# Altium PCB Sensor.PcbDoc
Units mm, origin at the board's own origin, x right, y up, seen from the top; angles counter-clockwise.
Board outline 29.97 x 31.24 mm, 2 copper layers (Top Layer, Bottom Layer); 27 components, 23 nets, 95 pads, 23 vias.
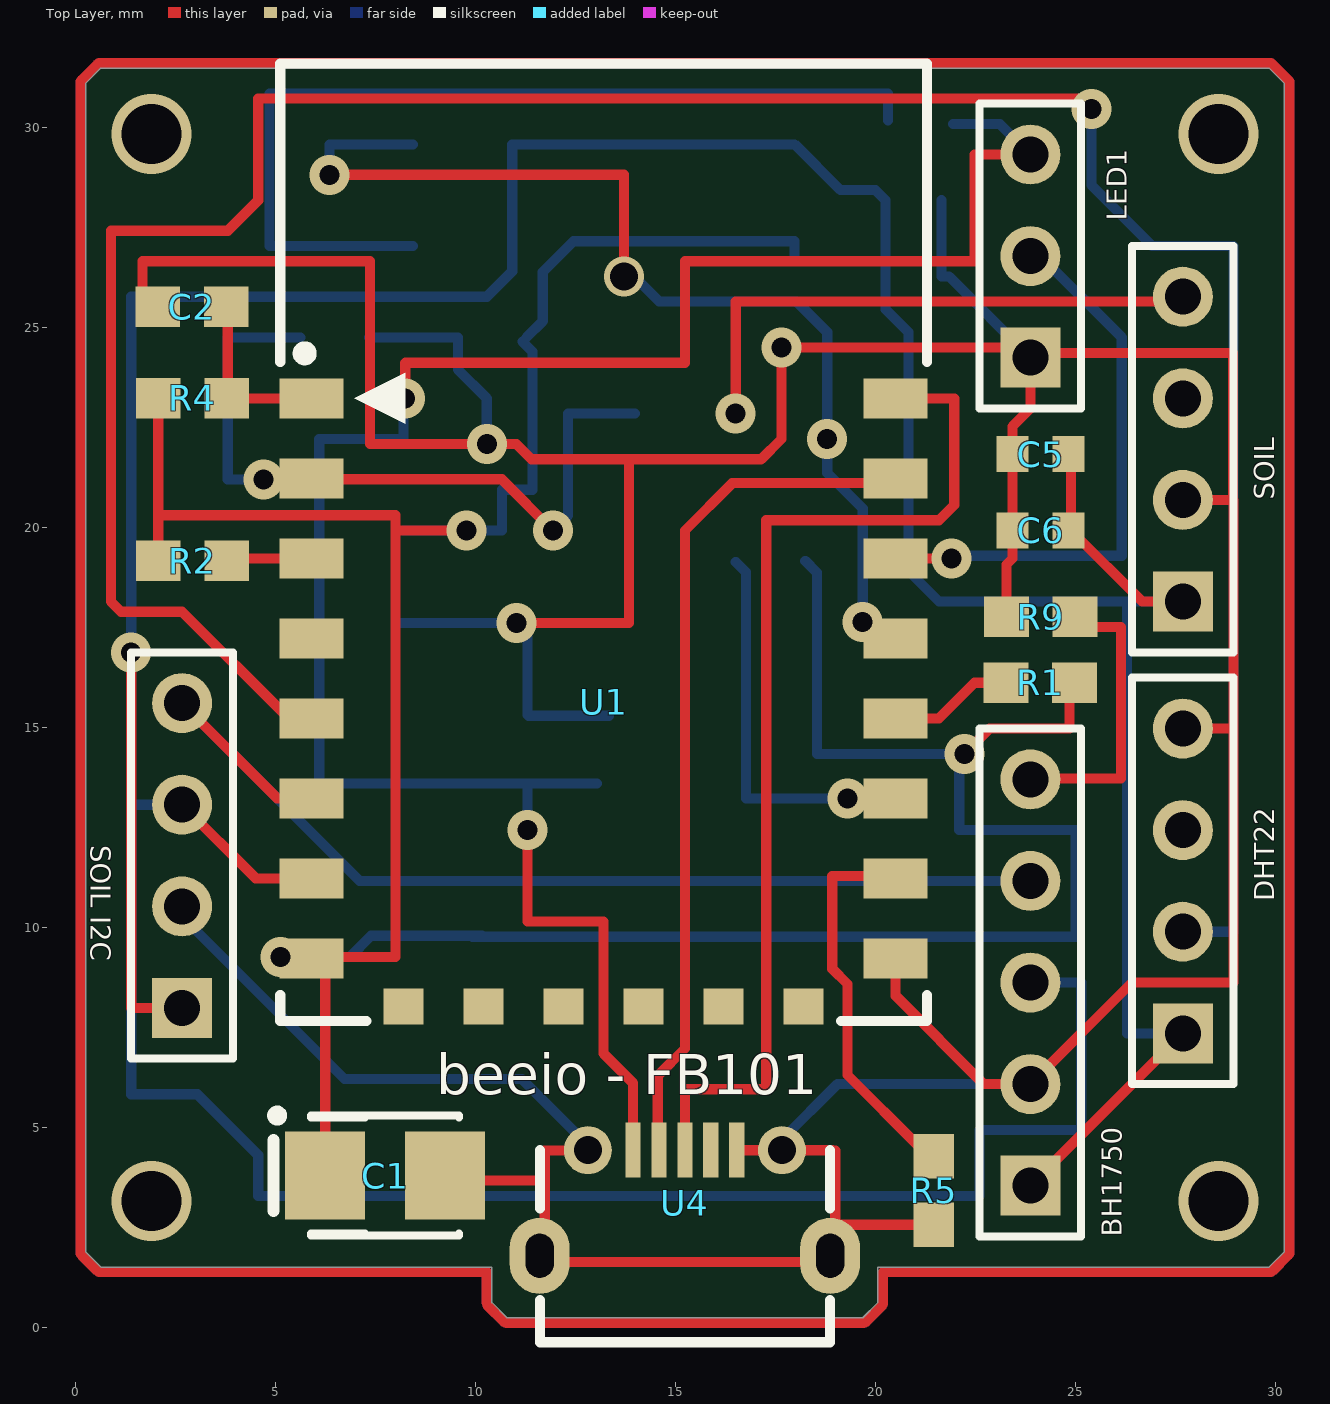
[diagram p0: Top Layer view]
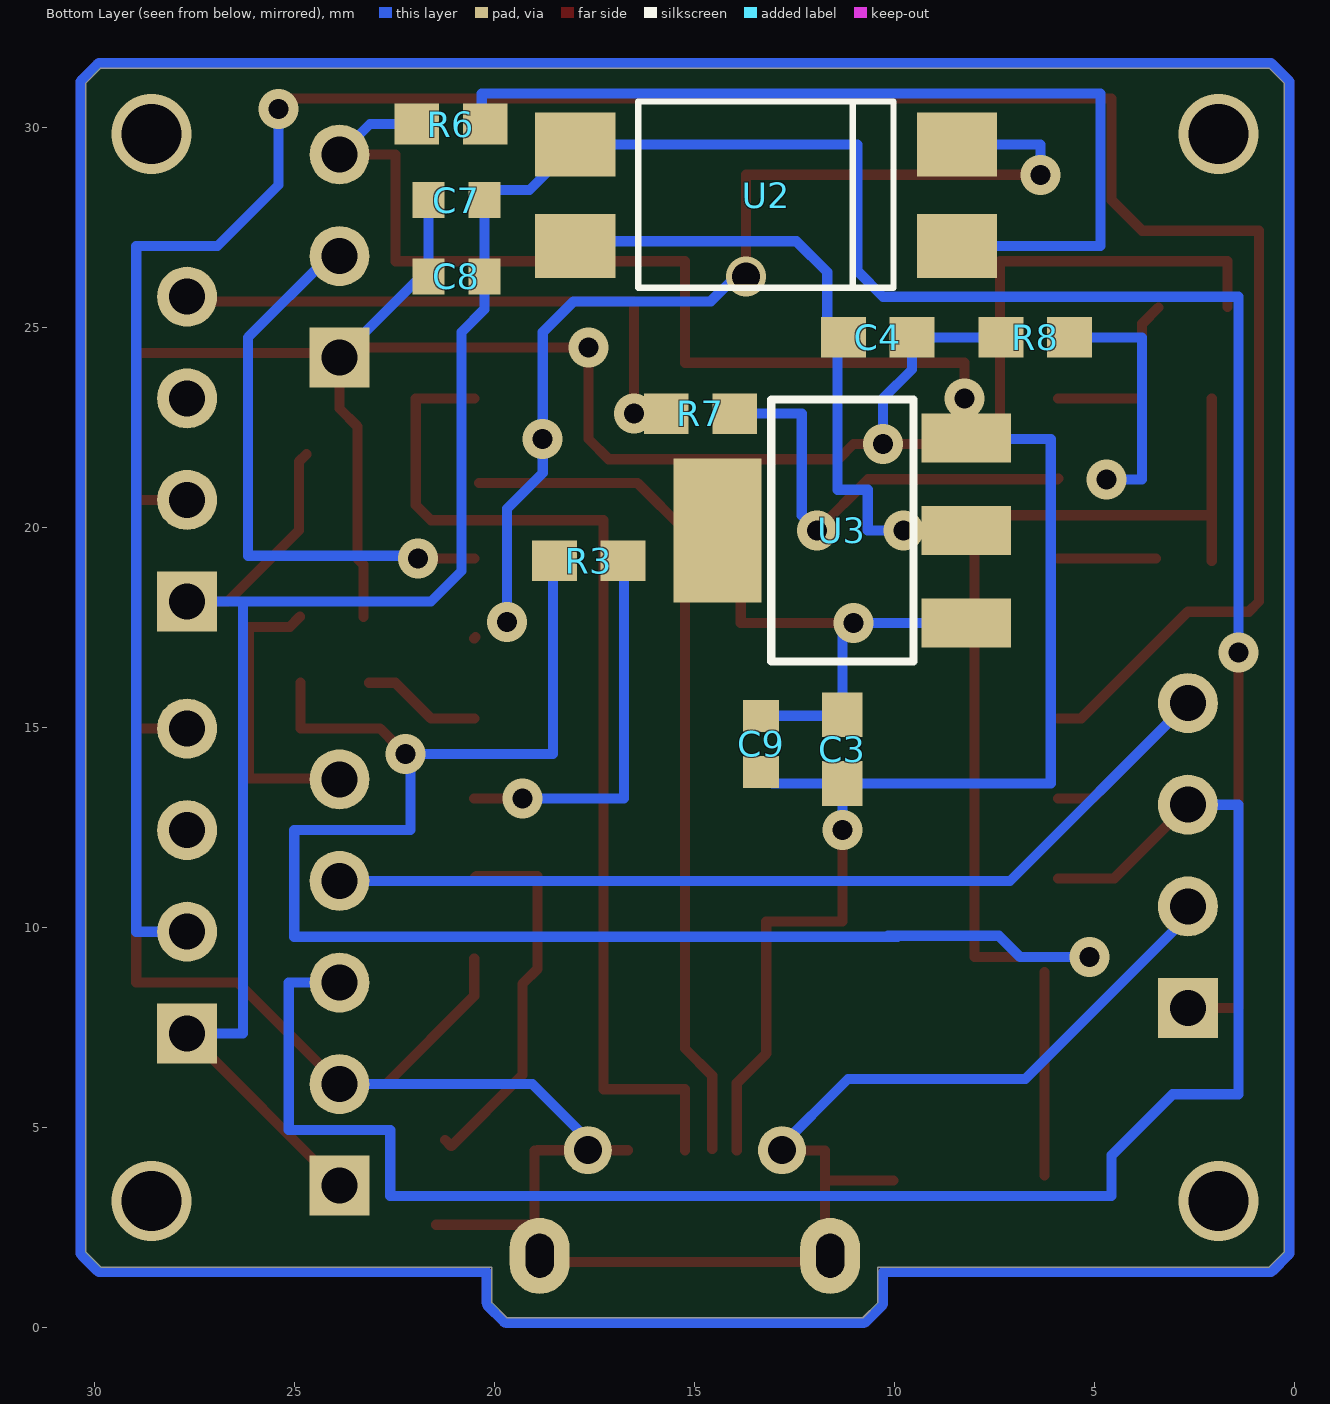
[diagram p1: Bottom Layer view, seen from below]

## Layer stack, top to bottom
Top Solder: solder mask 0.0102, Solder Resist, Dk 3.5
Top Layer: signal copper 0.0356
Dielectric 1: dielectric 0.32, FR-4, Dk 4.8
Bottom Layer: signal copper 0.0356
Bottom Solder: solder mask 0.0102, Solder Resist, Dk 3.5

## Board outline
0.635,31.496 29.845,31.496 30.226,31.115 30.226,1.905 29.845,1.524 20.066,1.524 20.066,0.635 19.685,0.254 10.795,0.254 10.414,0.635 10.414,1.524 0.635,1.524 0.254,1.905 0.254,31.115

## Design rules (kind name [scope] priority, off if disabled: settings)
Clearance [All] p1: gap=0.254
PolygonConnect [All] p1: connectstyle=Relief reliefconductorwidth=0.254 reliefentries=4 polygonreliefangle="90 Angle" airgapwidth=0.254
RoomDefinition Box [InComponentClass('Box')] p1: confinementstyle=ConfineIn formatcopy=TRUE lockcomponents=FALSE outline 0,31.75 30.48,31.75 30.48,0.344 30.074,0 0.068,0
RoutingVias [All] p1: holewidth=0.711 width=1.27 viastyle="Through Hole" minholewidth=0.5 minwidth=1 maxholewidth=0.711 maxwidth=1.27
SolderMaskExpansion [All] p1: expansion=0.102
Width [All] p1: maxlimit=0.254 minlimit=0.254 preferedwidth=0.254
30 further rules are at their usual default settings.

## Components (designator, comment, footprint, x,y, rotation, side; value= is the part's Value field where it differs from the comment)
BH1750 "BH1750" HDR1X5 23.876,3.556 r90 top
C1 "100uF 6.3V" SMT_C_Tantalum_B 7.747,3.81 r0 top
C2 "100nF" 0603 2.921,25.527 r180 top
C3 "10uF" 0603 11.303,14.478 r270 bottom
C4 "10uF" 0603 10.414,24.765 r0 bottom
C5 "100nF" 1608[0603] 24.13,21.844 r180 top
C6 "100nF" 1608[0603] 24.13,19.939 r180 top
C7 "100nF" 1608[0603] 20.955,28.194 r0 bottom
C8 "100nF" 1608[0603] 20.955,26.289 r0 bottom
C9 "100nF" 1608[0603] 13.335,14.605 r90 bottom
DHT22 "" HDR1X4 27.686,7.366 r90 top
LED1 "WS2812B" HDR1X3 23.876,24.257 r90 top
R1 "103" 0603 24.13,16.129 r180 top
R2 "103" 0603 2.921,19.177 r0 top
R3 "103" 0603 17.653,19.177 r180 bottom
R4 "103" 0603 2.921,23.241 r0 top
R5 "103" 0603 21.463,3.429 r90 top
R6 "102" 0603 21.082,30.099 r0 bottom
R7 "224" 0603 14.859,22.86 r180 bottom
R8 "104" 0603 6.477,24.765 r0 bottom
R9 "472" 0603 24.13,17.78 r0 top
SOIL "" HDR1X4 27.686,18.161 r90 top
"SOIL I2C" "BH1750" HDR1X4 2.667,8.001 r90 top
U1 "ESP_12_E" ESP_12_E_L 5.207,23.241 r0 top
U2 "PC817" DIL4-SMD 13.208,28.321 r90 bottom
U3 "LM1117 3.3V" SOT223 11.303,19.939 r90 bottom
U4 "Micro USB 5S DIP" USB_MICRO_5S_B 15.24,4.445 r180 top

## Footprints (in the part's own frame and the unit in brackets; to place one, negate y for a bottom-side part, rotate by r counter-clockwise, add the part's x,y. Pads: shape width x height; smd on the part's side, far side on the other; paste and mask are expansions set on the pad)
0603 [mil]
  rect 44x40 smd: 1(-33.46,0) 2(34,0)
1608[0603] [mm] "Chip Capacitor, Body 1.6x0.8mm, IPC High Density"
  rect 0.8x0.9 smd: 1(-0.7,0) 2(0.7,0)
  body extent -0.87,-0.48 0.87,0.48, height 1.3
DIL4-SMD [mil]
  rect 63x79 smd: 1(-50,-187.8) 2(50,-187.8) 3(50,188) 4(-50,188)
  silkscreen extent -91,-125 92,126
ESP_12_E_L [mm]
  rect 1.6x1 smd: 1(0.7,0) 2(0.7,-2) 3(0.7,-4) 4(0.7,-6) 5(0.7,-8) 6(0.7,-10) 7(0.7,-12) 8(0.7,-14) 15(15.3,-14) 16(15.3,-12) 17(15.3,-10) 18(15.3,-8) 19(15.3,-6) 20(15.3,-4) 21(15.3,-2) 22(15.3,0)
  rect 1x0.9 smd: 9(3,-15.2) 10(5,-15.2) 11(7,-15.2) 12(9,-15.2) 13(11,-15.2) 14(13,-15.2)
  silkscreen extent -0.08,-15.57 16.08,8.37, body extent 0,-15.49 16,8.51, height 2.75
HDR1X3 [mm] "Connector; Header; 3 Position"
  rect 1.5x1.5 hole 0.9: 1(0,0)
  round 1.5 hole 0.9: 2(2.54,0) 3(5.08,0)
  silkscreen extent -1.27,-1.27 6.35,1.27
HDR1X4 [mm] "Connector; Header; 4 Position"
  rect 1.5x1.5 hole 0.9: 1(0,0)
  round 1.5 hole 0.9: 2(2.54,0) 3(5.08,0) 4(7.62,0)
  silkscreen extent -1.27,-1.27 8.89,1.27
HDR1X5 [mm] "Connector; Header; 5 Position"
  rect 1.5x1.5 hole 0.9: 1(0,0)
  round 1.5 hole 0.9: 2(2.54,0) 3(5.08,0) 4(7.62,0) 5(10.16,0)
  silkscreen extent -1.27,-1.27 11.43,1.27
SMT_C_Tantalum_B [mm]
  rect 2x2.2 smd: 1(-1.5,0) 2(1.5,0)
  silkscreen extent -2.82,-1.5 1.85,1.62, body extent -1.75,-1.4 1.75,1.4, height 1.9
SOT223 [mil]
  rect 48x88 smd: 1(-91,-122) 2(0,-122) 3(91,-122)
  rect 142x87 smd: 4(0,123)
  silkscreen extent -129,-70 129,70
USB_MICRO_5S_B [mil]
  rect 15x54 smd: 1(51,0) 2(25.5,0) 3(0,0) 4(-25.5,0) 5(-51,0)
  oval 59.06x74.8 hole 27.56 slot 43.31 at 90 deg: 6(-143,104) 7(143,104)
  round 47.24 hole 27.5: 8(95.5,0) 9(-95.5,0)
  silkscreen extent -143,0 143,189, body extent -161,-9 161,204, height 105

## Part data
BH1750: library part "Header 5", "Header, 5-Pin"
C1: library part SMT_C_Tantalum_B, "Capacitor, SM Tantalum; Body 3.5 x 2.8 mm (LxW typ)"
C2 C3 C4: library part CAP0603
C5 C6 C7 C8 C9: library part "Cap Semi", "Capacitor (Semiconductor SIM Model)"
DHT22 SOIL "SOIL I2C": library part "Header 4", "Header, 4-Pin"
LED1: library part "Header 3", "Header, 3-Pin"
R1 R2 R3 R4 R5 R6 R7 R8 R9: library part RESISTOR0603
U1: "ESP-12 Wi-Fi Module by AI-Thinker"
U3: library part V_REG_LM1117SOT223
U4: library part USB_Micro_5S_B, "USB micro female SMT with 4 fixed foot"

## Via types
v1: diameter 1, hole 0.5, Top Layer to Bottom Layer, 18 vias
v2: diameter 2, hole 1.5, Top Layer to Bottom Layer, 4 vias
v3: diameter 1, hole 0.7, Top Layer to Bottom Layer, 1 vias

## Nets (pads, with @x,y where several pads share a name; then routed paths per layer and width w, separated by ;. In a path a pad name is that pad's centre, name@x,y a point inside that pad or via, vN(x,y) a via of type N, cw(c..) or ccw(c..) an arc to the next point about the centre after c; other vN are vias at no path point)
3V3: "SOIL I2C.1" BH1750.1 C5.1 C6.1 C7.1 C8.1 DHT22.1 SOIL.1 U2.3 | length 83.1
  Top Layer w0.254: v1(1.397,16.891) 1.397,8.001 2.667,8.001 ; BH1750.1 DHT22.1 ; C5.1@24.703,21.844 24.892,21.655 24.892,19.939 26.67,18.161 SOIL.1
  Bottom Layer w0.254: v1(1.397,16.891) 1.397,25.781 10.287,25.781 10.922,26.416 10.922,29.591 U2.3 19.126,28.448 20.001,28.448 C7.1 C8.1 20.255,25.465 20.828,24.892 20.828,18.923 21.59,18.161 SOIL.1 26.289,18.161 26.289,7.366 DHT22.1
ADC: R7.2 R8.1 U1.2 | length 17.6
  Top Layer w0.254: U1.2 5.931,21.217 10.66,21.217 v1(11.938,19.939)
  Bottom Layer w0.254: v1(4.699,21.209) 3.81,21.209 3.81,24.765 R8.1 ; v1(11.938,19.939) 12.319,20.32 12.319,22.86 R7.2
ADC_EX: R7.1 SOIL.4 | length 13.9
  Top Layer w0.254: v1(16.51,22.86) 16.51,25.666 SOIL.4@27.571,25.666
DH: DHT22.2 U1.5 | length 67.7
  Top Layer w0.254: U1.5 5.333,15.241 2.667,17.907 1.143,17.907 0.889,18.161 0.889,27.432 3.81,27.432 4.572,28.194 4.572,30.734 25.122,30.734 v1@25.388,30.468
  Bottom Layer w0.254: v1@25.654,30.607 25.4,30.353 25.4,28.575 26.924,27.051 28.956,27.051 28.956,9.906 DHT22.2
  other v1: 25.4,30.48
EN: R2.2 U1.3 | length 2.4
  Top Layer w0.254: R2.2@3.468,19.241 U1.3
GND: "SOIL I2C.2" BH1750.2 C1.2 C2.2 C3.1 C4.1 C5.2 C6.2 C7.2 C8.2 C9.2 DHT22.4 LED1.1 R5.1 R8.2 R9.1 SOIL.2 U1.15 U3.1 U4.5 U4.6 U4.7 U4.8 U4.9 | length 137.4
  Top Layer w0.254: C2.2@1.676,25.527 1.676,26.67 7.366,26.67 7.366,22.098 v1(10.287,22.098) 11.025,22.098 11.406,21.717 17.145,21.717 17.653,22.225 v1(17.653,24.511) 23.622,24.511 LED1.1 ; C1.2@10.033,3.683 11.735,3.683 ; v1(11.024,17.628) 13.843,17.628 13.843,21.717 ; U4.7@11.735,1.803 11.735,3.683 ; 11.735,2.946 11.735,1.651 U4.6@18.847,1.651 ; U4.8@12.934,4.438 11.735,4.438 11.735,3.683 ; U4.5@16.662,4.445 U4.9 18.923,4.445 ; U4.6@18.999,1.803 18.999,4.438 ; U4.6@19.087,2.579 R5.1 ; U1.15 20.507,8.302 22.713,6.096 BH1750.2 26.416,8.636 28.956,8.636 28.956,14.986 ; R9.1 23.28,19.089 23.43,19.239 C6.2 C5.2 23.43,22.541 23.876,22.987 LED1.1 ; DHT22.4 28.956,14.986 ; SOIL.2 28.956,20.701 28.956,14.986 ; 28.944,20.713 28.944,24.372 23.876,24.372 LED1.1
  Bottom Layer w0.254: 2.667,10.541 2.667,10.287 6.731,6.223 11.163,6.223 U4.8@12.941,4.445 ; R8.2 C4.1 9.564,23.964 10.287,23.241 v1(10.287,22.098) ; U3.1@8.128,17.628 U3.1 v1(11.024,17.628) v1@11.049,17.653 ; C3.1 v1@11.303,17.348 ; C3.1@11.326,15.305 C9.2 ; U4.9 17.666,4.712 19.05,6.096 BH1750.2 ; C7.2 C8.2 21.844,26.289 LED1.1
GPIO0: R1.2 U1.18 | length 3
  Top Layer w0.254: U1.18 21.591,15.241 22.479,16.129 R1.2@23.139,16.129
GPIO2: R3.2 U1.17 | length 9.8
  Top Layer w0.254: v1(19.304,13.241) U1.17
  Bottom Layer w0.254: R3.2@16.51,19.152 16.764,18.898 16.764,13.241 v1(19.304,13.241)
GPIO9: U1.11
GPIO10: U1.12
GPIO15: R5.2 U1.16 | length 9.5
  Top Layer w0.254: U1.16 20.445,11.303 18.923,11.303 18.923,8.979 19.304,8.598 19.304,6.325 21.082,4.547 R5.2@21.234,4.699
GPIO16: U1.4
LED: LED1.2 U1.20 | length 14.2
  Top Layer w0.254: U1.20 v1(21.908,19.241)
  Bottom Layer w0.254: v1@21.971,19.304 26.162,19.304 26.162,24.765 24.13,26.797 LED1.2
NetBH1750_5: BH1750.5 R9.2 | length 7.4
  Top Layer w0.254: BH1750.5@23.894,13.734 26.144,13.734 26.144,17.526 25.121,17.526 R9.2@24.867,17.78
NetR6_1: R6.1 U2.1 | length 23.5
  Bottom Layer w0.254: U2.1 4.85,27.051 4.85,30.861 20.32,30.861 R6.1@20.32,30.187
NRST: C2.1 R4.2 U1.1 | length 4.5
  Top Layer w0.254: C2.1@3.404,25.513 3.81,25.107 3.81,23.241 5.334,23.241 U1.1
PWR_EN: U1.19 U2.2 | length 25.8
  Top Layer w0.254: v1(6.35,28.829) 13.716,28.829 v3(13.716,26.289) ; U1.19@20.476,17.272 U1.19
  Bottom Layer w0.254: v1(6.35,28.829) 6.35,29.591 U2.2 ; v3@13.97,26.289 14.593,25.666 18.022,25.666 18.796,24.892 v1(18.796,22.225) 18.796,21.376 19.685,20.487 v1(19.685,17.653)
RX: U1.21 U4.2 | length 21.4
  Top Layer w0.254: U4.2@14.559,4.478 14.559,6.304 15.24,6.985 15.24,19.939 16.423,21.122 U1.21@20.388,21.122
SCL: "SOIL I2C.3" BH1750.3 U1.7 | length 44.5
  Top Layer w0.254: 2.667,13.081 4.507,11.241 U1.7
  Bottom Layer w0.254: 2.667,13.081 1.397,13.081 1.397,5.842 3.048,5.842 4.572,4.318 4.572,3.302 22.606,3.302 22.606,4.953 25.146,4.953 25.146,8.636 BH1750.3
SDA: "SOIL I2C.4" BH1750.4 U1.6 | length 27.3
  Top Layer w0.254: 2.667,15.621 5.047,13.241 U1.6
  Bottom Layer w0.254: 2.667,15.621 7.112,11.176 BH1750.4
TX: U1.22 U4.3 | length 26.8
  Top Layer w0.254: U4.3 15.24,5.969 17.272,5.969 17.272,20.193 21.59,20.193 21.971,20.574 21.971,23.241 U1.22
VDD3V3: C1.1 C4.2 R1.1 R2.1 R3.1 R4.1 U1.8 U2.4 U3.2 | length 86.5
  Top Layer w0.254: R2.1 2.071,20.32 ; R4.1 2.071,20.32 ; U1.8@5.937,9.271 8.001,9.271 8.001,20.32 2.071,20.32 ; C1.1 U1.8@6.247,8.901 ; 8.128,19.939 v1(9.779,19.939) ; v1@22.441,14.567 22.86,14.986 24.853,14.986 R1.1@24.853,16.129
  Bottom Layer w0.254: v1(5.123,9.271) 6.858,9.271 7.391,9.804 10.16,9.804 ; U3.2 v1(9.779,19.939) 10.668,19.939 10.668,20.955 11.43,20.955 11.43,24.409 C4.2@11.176,24.663 ; 9.931,9.779 25.007,9.779 25.007,12.446 22.098,12.446 v1@22.098,13.895 ; C4.2 11.684,25.171 11.684,26.4 12.454,27.17 17.983,27.17 U2.4 U2.4@17.983,26.721 ; R3.1@18.249,19.177 18.542,18.884 18.542,14.351 v1(22.225,14.351)
VDD5V: C3.2 C9.1 LED1.3 R6.2 U3.3 U4.1 | length 54
  Top Layer w0.254: v1(8.247,23.241) 8.247,24.122 8.255,24.13 15.24,24.13 15.24,26.67 22.479,26.67 22.479,29.337 LED1.3 ; v1(11.303,12.446) 11.303,10.16 13.208,10.16 13.208,6.858 13.945,6.121 U4.1
  Bottom Layer w0.254: U3.3@8.128,22.225 6.096,22.225 6.096,13.614 C3.2 ; U3.3 v1@8.204,23.317 ; v1(11.303,12.446) C3.2 ; C9.1@13.044,13.614 C3.2 ; R6.2 23.114,30.099 LED1.3
pads on no net: DHT22.3 SOIL.3 U1.9 U1.10 U1.13 U1.14 U3.4 U4.4
copper on no net:
  other v2: 1.905,3.175 28.575,3.175 1.905,29.845 28.575,29.845

## Other copper
Multi-Layer:
  lines w0.254: 0.127,1.905 ccw(c0.254,1.905) 0.164,1.815 ; 0.127,1.905 ccw(c0.254,1.905) 0.164,1.815 ; 0.127,1.905 0.127,31.115 ; 0.127,31.115 cw(c0.254,31.115) 0.165,31.205 ; 0.127,31.115 cw(c0.254,31.115) 0.164,31.205 0.165,31.205 ; 0.164,1.815 0.545,1.434 ; 0.165,31.205 0.545,31.585 ; 0.545,1.434 ccw(c0.635,1.524) 0.635,1.397 ; 0.545,1.434 ccw(c0.635,1.524) 0.635,1.397 ; 0.545,31.585 cw(c0.635,31.496) 0.635,31.623 ; 0.545,31.585 0.545,31.586 cw(c0.635,31.496) 0.635,31.623 ; 0.635,1.397 10.287,1.397 10.287,0.635 ; 0.635,31.623 29.845,31.623 ; 10.287,0.635 ccw(c10.414,0.635) 10.324,0.545 ; 10.287,0.635 ccw(c10.414,0.635) 10.324,0.545 ; 10.324,0.545 10.705,0.164 ; 10.705,0.164 ccw(c10.795,0.254) 10.795,0.127 ; 10.705,0.164 ccw(c10.795,0.254) 10.795,0.127 ; 10.795,0.127 19.685,0.127 ; 19.685,0.127 ccw(c19.685,0.254) 19.775,0.164 19.775,0.165 ; 19.685,0.127 ccw(c19.685,0.254) 19.775,0.165 ; 19.775,0.165 20.155,0.545 ; 20.155,0.545 ccw(c20.066,0.635) 20.193,0.635 ; 20.155,0.545 20.156,0.545 ccw(c20.066,0.635) 20.193,0.635 ; 20.193,0.635 20.193,1.397 29.845,1.397 ; 29.845,1.397 ccw(c29.845,1.524) 29.935,1.434 ; 29.845,1.397 ccw(c29.845,1.524) 29.935,1.434 ; 29.845,31.623 cw(c29.845,31.496) 29.935,31.585 ; 29.845,31.623 cw(c29.845,31.496) 29.935,31.586 29.935,31.585 ; 29.935,1.434 30.316,1.815 ; 29.935,31.585 30.315,31.205 ; 30.315,31.205 cw(c30.226,31.115) 30.353,31.115 ; 30.315,31.205 30.316,31.205 cw(c30.226,31.115) 30.353,31.115 ; 30.316,1.815 ccw(c30.226,1.905) 30.353,1.905 ; 30.316,1.815 ccw(c30.226,1.905) 30.353,1.905 ; 30.353,1.905 30.353,31.115

## Silkscreen, mask and mechanical layers (free items; w line width, h text height)
Top Overlay:
  text "beeio - FB101" at 9.017,5.842 h1

## Text inside footprints (layer, text, board x,y; h text height)
U1: Mechanical 13 "CUTOUT POLYGON" at 6.706,30.556 h0.25; Mechanical 13 "ANTENNA AREA" at 6.706,31.064 h0.25